# Altium PCB PCB1.PcbDoc
Units mil, origin at the board's own origin, x right, y up, seen from the top; angles counter-clockwise.
Board outline 3880 x 3235 mil, 2 copper layers (Top Layer, Bottom Layer); 25 components, 16 nets, 63 pads, 0 vias.
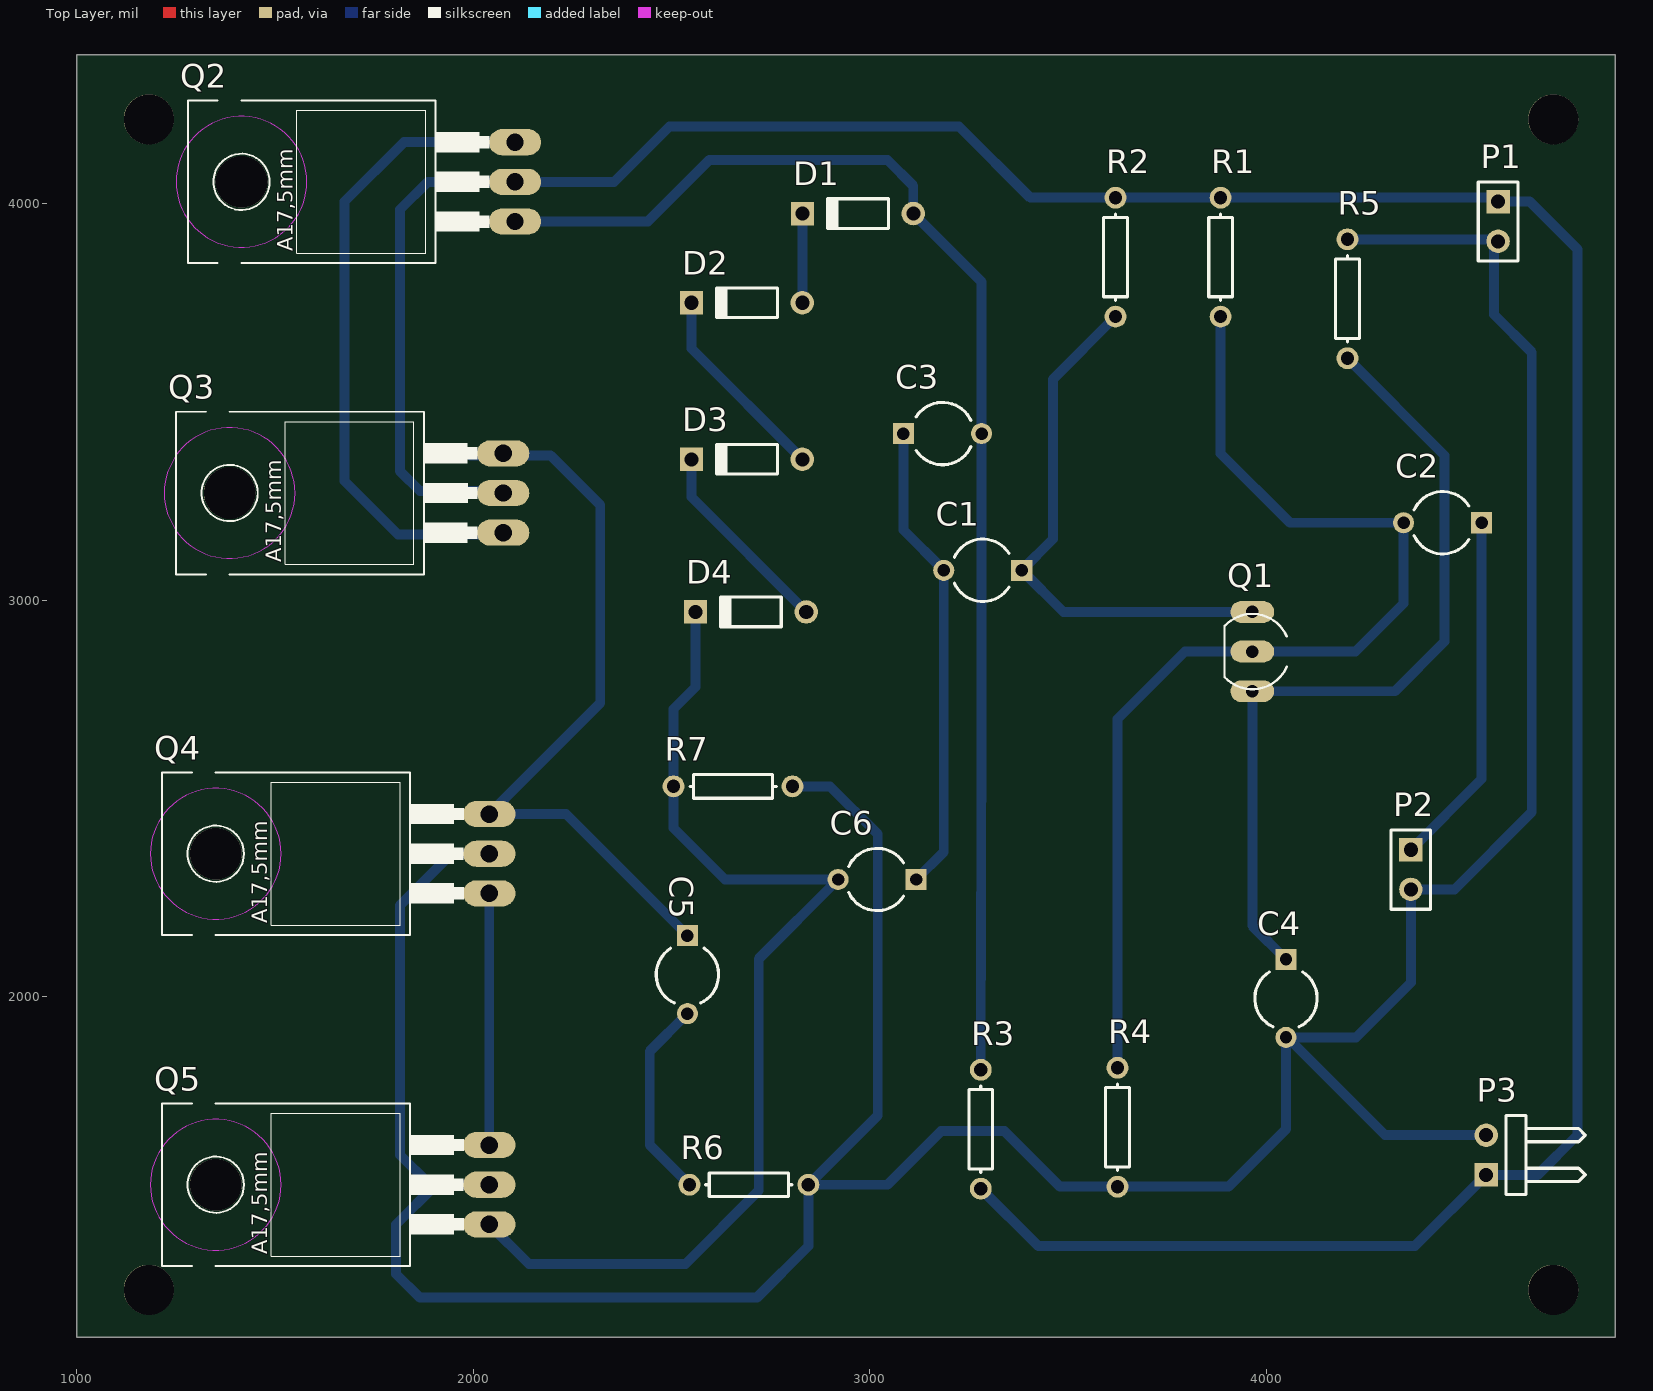
[diagram p0: Top Layer view]
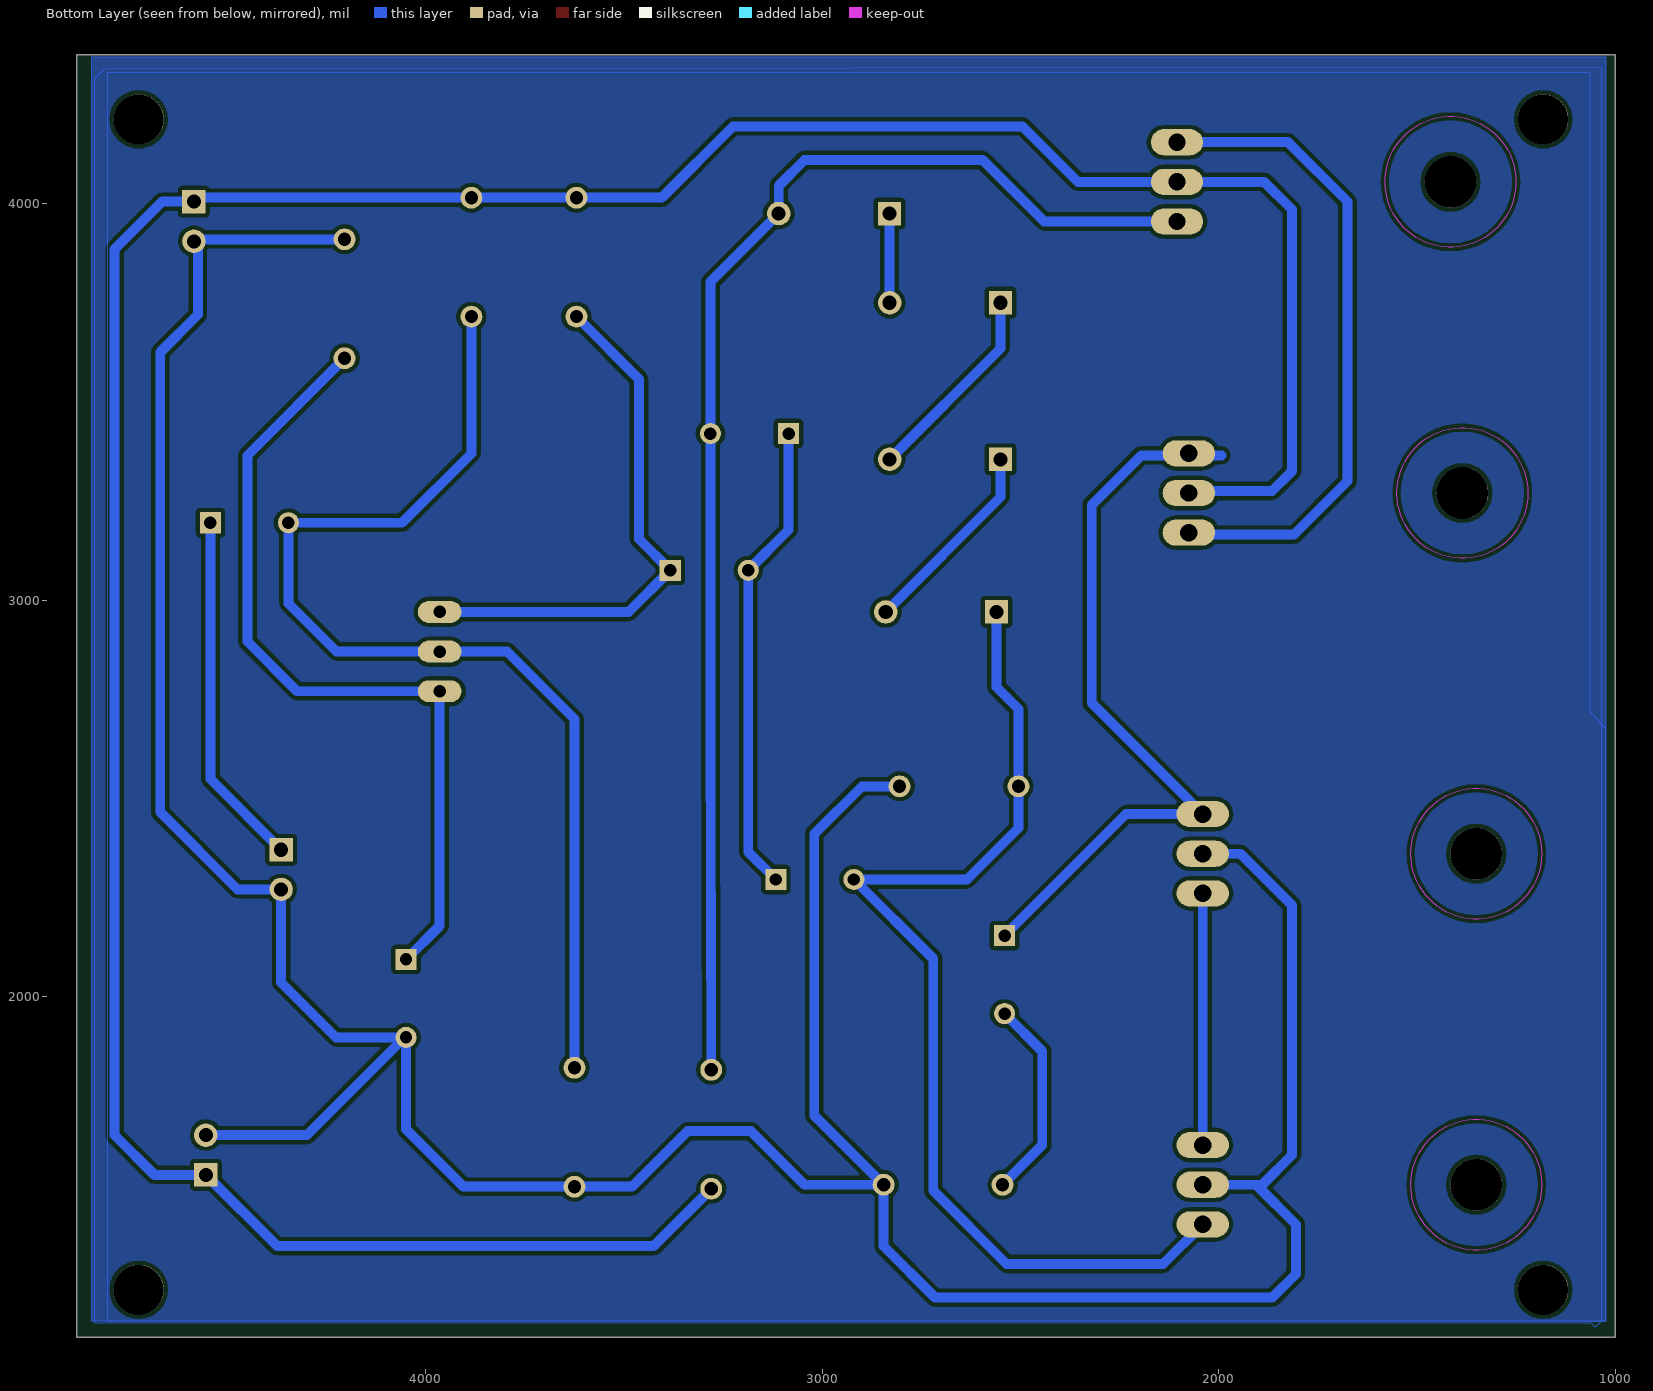
[diagram p1: Bottom Layer view, seen from below]

## Layer stack, top to bottom
Top Solder: solder mask 0.4, Solder Resist, Dk 3.5
Top Layer: signal copper 1.4
Dielectric 1: dielectric 12.6, FR-4, Dk 4.8
Bottom Layer: signal copper 1.4
Bottom Solder: solder mask 0.4, Solder Resist, Dk 3.5

## Board outline
1000,1140 4880,1140 4880,4375 1000,4375

## Design rules (kind name [scope] priority, off if disabled: settings)
Clearance [All] p1: gap=10 ignorepadtopadclearanceinfootprint=FALSE except(0: Arc-Hole Track-Hole SMDPad-Hole THPad-Hole Via-Hole Fill-Hole Poly-Hole Region-Hole Text-Hole)
PolygonConnect [All] p1: connectstyle=Relief reliefconductorwidth=10 reliefentries=4 polygonreliefangle="90 Angle" airgapwidth=10
RoomDefinition shematic [InComponentClass('shematic')] p1: confinementstyle=ConfineIn formatcopy=TRUE lockcomponents=FALSE outline 1120,1310 6865,1310 6865,4835 1120,4835
RoutingLayers [All] p1: top layer_v5=FALSE bottom layer_v5=TRUE
RoutingVias [All] p1: holewidth=28 width=50 viastyle="Through Hole" minholewidth=28 minwidth=50 maxholewidth=28 maxwidth=50
SolderMaskExpansion [All] p1: expansion=4
Width [All] p1: maxlimit=30 minlimit=25 preferedwidth=25
29 further rules are at their usual default settings.

## Components (designator, comment, footprint, x,y, rotation, side; value= is the part's Value field where it differs from the comment)
C1 "Cap2" CAPR5-4X5 3285,3075 r180 top value=1000uF
C2 "Cap2" CAPR5-4X5 4445,3195 r180 top value=1000uF
C3 "Cap2" CAPR5-4X5 3183.43,3420 r0 top value="33 uF"
C4 "Cap2" CAPR5-4X5 4050,1995 r270 top value=1000uF
C5 "Cap2" CAPR5-4X5 2540,2055 r270 top value=1000uF
C6 "Cap2" CAPR5-4X5 3018.43,2295 r180 top value="33 uF"
D1 "Diode 1N4148" DO-35 2970,3975 r180 top
D2 "Diode 1N4148" DO-35 2690,3750 r180 top
D3 "Diode 1N4148" DO-35 2690,3355 r180 top
D4 "Diode 1N4148" DO-35 2700,2970 r180 top
P1 "Fan" HDR1X2 4585,4005 r270 top
P2 "Input" HDR1X2 4365,2370 r270 top
P3 "Power" HDR1X2H 4555,1550 r90 top
Q1 "BC547" TRANSISTOR-TO92-CBE 3965,2870 r270 top
Q2 "TIP31" TO220 1855,4055 r90 top
Q3 "TIP31" TO220 1825,3270 r90 top
Q4 "TIP32" TO220 1790,2360 r90 top
Q5 "TIP32" TO220 1790,1525 r90 top
R1 "Res1" AXIAL-0.3 3885,3865 r270 top value=9K
R2 "Res1" AXIAL-0.3 3620,3865 r270 top value=100
R3 "Res1" AXIAL-0.3 3280,1665 r270 top value=10K
R4 "Res1" AXIAL-0.3 3625,1670 r90 top value=3K
R5 "Res1" AXIAL-0.3 4205,3760 r90 top value=40
R6 "Res1" AXIAL-0.3 2695,1525 r180 top value=8
R7 "Res1" AXIAL-0.3 2655,2530 r180 top value=10K

## Footprints (in the part's own frame and the unit in brackets; to place one, negate y for a bottom-side part, rotate by r counter-clockwise, add the part's x,y. Pads: shape width x height; smd on the part's side, far side on the other; paste and mask are expansions set on the pad)
AXIAL-0.3 [mm] "Axial Device, Thru-Hole; 2 Leads; 0.3 in Pin Spacing"
  round 1.4 hole 0.85: 1(-3.81,0) 2(3.81,0)
  silkscreen extent -2.77,-0.76 2.77,0.76
CAPR5-4X5 [mm] "Capacitor; 2 Leads"
  rect 1.35x1.35 hole 0.8: 1(-2.5,0)
  round 1.35 hole 0.8: 2(2.5,0)
  silkscreen extent -1.69,-2 1.82,2
DO-35 [mm] "Diode, Axial; Body 3.8 x 1.9 mm (LxDia. max), Lead Dia. 0.53 mm (max)"
  round 1.5 hole 0.9: 1(-3.55,0)
  rect 1.5x1.5 hole 0.9: 2(3.55,0)
  silkscreen extent -1.95,-0.95 2.05,0.95
HDR1X2 [mm] "Connector; Header; 2 Position"
  rect 1.5x1.5 hole 0.9: 1(0,0)
  round 1.5 hole 0.9: 2(2.54,0)
  silkscreen extent -1.27,-1.27 3.81,1.27
HDR1X2H [mm] "Connector; Header; 2 Position; Right Angle"
  rect 1.5x1.5 hole 0.9: 1(0,0)
  round 1.5 hole 0.9: 2(2.54,0)
  silkscreen extent -1.27,-6.35 3.81,-1.27
TO220 [mil]
  oval 66x132 hole 44: 1(-100,-250) 2(0,-250) 3(100,-250)
  round 130 hole 130 unplated: ""(0,440)
  Keep-Out Layer circle w0: c0,440 r165
  Keep-Out Layer circle w0: c0,440 r165
  silkscreen extent -205,-185 205,575
TRANSISTOR-TO92-CBE [mm]
  oval 1.4x2.8 hole 0.8: B(0,0) C(-2.54,0) E(2.54,0)
  silkscreen extent -2.41,-1.78 2.41,2.2

## Part data
C1 C2 C3 C4 C5 C6: "Capacitor", PackageDescription="Capacitor; 2 Leads", PackageReference=CAPR5-4X5, Published=23-Sep-2002, Publisher="Altium Limited"
D1 D2 D3 D4: "High Conductance Fast Diode", Code_JEDEC=DO-204-AH, ComponentLink1Description="Manufacturer Link", ComponentLink1URL=http://www.fairchildsemi.com/, ComponentLink2Description=Datasheet, ComponentLink2URL=http://www.fairchildsemi.com/ds/1N%2F1N4148.pdf, DatasheetVersion=1997, LatestRevisionDate=17-Jul-2002, LatestRevisionNote="Re-released for DXP Platform.", PackageDescription="Diode, Axial; Body 3.8 x 1.9 mm (LxDia. max), Lead Dia. 0.53 mm (max)", PackageReference=DO-35, Published=8-Jun-2000, Publisher="Altium Limited"
P1 P2: library part "Header 2", "Header, 2-Pin", LatestRevisionDate=17-Jul-2002, LatestRevisionNote="Re-released for DXP Platform.", Publisher="Altium Limited"
P3: library part "Header 2H", "Header, 2-Pin, Right Angle", LatestRevisionDate=17-Jul-2002, LatestRevisionNote="Re-released for DXP Platform.", Publisher="Altium Limited"
Q1: "Bipolar _BJT_ Transistor NPN 45V 100mA 300MHz 500mW Through Hole TO-92-3", Package="TO-92 ON Semiconductor", Availability=Unavailable, MF="ON Semiconductor", MP=BC547, Price=None, SnapEDA_Link=https://www.snapeda.com/parts/BC547/ON%20Semiconductor/view-part/608530/?ref=snap
Q2 Q3: "Bipolar _BJT_ Transistor NPN 40V 3A 3MHz 2W Through Hole TO-220AB", Package="TO-220 Texas Instruments", Availability=Unavailable, MF="ON Semiconductor", MP=TIP31, Price=None, SnapEDA_Link=https://www.snapeda.com/parts/TIP31/ON%20Semiconductor/view-part/2746873/?ref=snap
Q4 Q5: "Bipolar _BJT_ Transistor PNP 40V 3A 3MHz 2W Through Hole TO-220-3", Package="TO-220 ON Semiconductor", Availability=Unavailable, MF="ON Semiconductor", MP=TIP32, Price=None, SnapEDA_Link=https://www.snapeda.com/parts/TIP32/ON%20Semiconductor/view-part/4572277/?ref=snap
R1 R2 R3 R4 R5 R6 R7: "Resistor", LatestRevisionDate=17-Jul-2002, LatestRevisionNote="Re-released for DXP Platform.", PackageDescription="Axial Device, Thru-Hole; 2 Leads; 0.3 in Pin Spacing", PackageReference=AXIAL-0.3, Published=8-Jun-2000, Publisher="Altium Limited"

## Free pads (board coordinates)
  round 126 hole 126 unplated: 6(4724.41,1259.84)
  round 126 hole 126: 7(4724.41,4212.6) 8(1181.1,1259.84) 9(1181.1,4212.6)

## Nets (pads, with @x,y where several pads share a name; then routed paths per layer and width w, separated by ;. In a path a pad name is that pad's centre, name@x,y a point inside that pad or via, vN(x,y) a via of type N, cw(c..) or ccw(c..) an arc to the next point about the centre after c; other vN are vias at no path point)
"12 V DC": P1.1 P3.1 Q2.2 Q3.2 R1.1 R2.1 R3.2 | length 8044.2
  Bottom Layer w25: Q3.2 2070,3275 1865,3275 1815,3325 1815,3985 1885,4055 Q2.2 2355,4055 2495,4195 3225,4195 3405,4015 R2.1 R1.1 4575,4015 P1.1 4665,4005 4785,3885 4785,1650 4685,1550 P3.1 4375,1370 3425,1370 R3.2
GND: C4.2 P1.2 P2.2 P3.2 Q4.2 Q5.2 R4.1 R5.2 R6.1 R7.1 | length 9000.2
  Bottom Layer w25: Q5.2 1905,1525 ; Q4.2 1945,2360 1815,2230 1815,1600 1890,1525 1905,1525 ; R7.1 2900,2530 3020,2410 3020,1700 R6.1 ; R5.2 4580,3910 P1.2 4575,3895 4575,3720 4670,3625 4670,2465 4475,2270 P2.2 4365,2035 4226.57,1896.57 C4.2@4053.43,1896.57 ; P3.2 4300,1650 C4.2@4053.43,1896.57 ; 1905,1525 1805,1425 1805,1300 1865,1240 2715,1240 2845,1370 R6.1 ; R6.1 3045,1525 3180,1660 3340,1660 3480,1520 R4.1 3905,1520 4050,1665 C4.2 C4.2@4053.43,1896.57
Input: C2.1 P2.1 | length 898.9
  Bottom Layer w25: P2.1 4543.43,2548.43 C2.1
NetC1_1: C1.1 Q1.C R2.2 | length 1363.1
  Bottom Layer w25: R2.2 3462,3557 3462,3153.57 C1.1 3488.43,2970 Q1.C
NetC2_2: C2.2 Q1.B R1.2 R4.2 | length 2804.8
  Bottom Layer w25: R4.2 3625,2700 3795,2870 Q1.B 4225,2870 4346.57,2991.57 C2.2 4060,3195 3885,3370 R1.2
NetC3_2: C3.2 D1.1 Q2.1 R3.1 | length 3397.3
  Bottom Layer w25: Q2.1 2440,3955 2595,4110 3045,4110 3109.76,4045.24 D1.1 3281.85,3802.91 C3.2 3281.85,2713.85 R3.1
NetC4_1: C4.1 Q1.E R5.1 | length 2065
  Bottom Layer w25: C4.1 3965,2178.43 Q1.E 4325,2770 4450,2895 4450,3365 R5.1
NetC5_1: C5.1 Q3.3 Q4.3 | length 1901.7
  Bottom Layer w25: 1993,3365 2195,3365 2320,3240 2320,2740 Q4.3 2233.43,2460 C5.1
NetC5_2: C5.2 R6.2 | length 512.3
  Bottom Layer w25: C5.2 2445,1861.57 2445,1625 R6.2
NetC6_2: C6.2 D4.2 Q5.1 R7.2 | length 2702.6
  Bottom Layer w25: Q5.1 2140,1325 2535,1325 2720,1510 2720,2095 C6.2 2635,2295 2505,2425 R7.2 2505,2725 2560.24,2780.24 D4.2
NetD1_2: D1.2 D2.1 | length 225.2
  Bottom Layer w25: D2.1 2830.24,3750.47 D1.2
NetD2_2: D2.2 D3.1 | length 510.8
  Bottom Layer w25: D2.2 2550.24,3634.53 D3.1
NetD3_2: D3.2 D4.1 | length 504.9
  Bottom Layer w25: D3.2 2550.24,3259.53 D4.1
NetQ2_3: Q2.3 Q3.1 | length 1643.1
  Bottom Layer w25: Q3.1@2065,3165 1810,3165 1675,3300 1675,4005 1825,4155 Q2.3
NetQ4_1: Q4.1 Q5.3 | length 635
  Bottom Layer w25: Q5.3 Q4.1
"STAGE 1 OUTPUT": C1.2 C3.1 C6.1 | length 1196
  Bottom Layer w25: C3.1 3085,3176.57 C1.2 3186.57,2364.72 C6.1
pads on no net: Q2. Q3. Q4. Q5.

## Polygon pours and split planes (outlines as drawn)
no net on Bottom Layer "Bottom Layer-No Net" (solid, shelved, pour order 2): 1062.99,4330.71 4803.15,4330.71 4803.15,1181.1 1023.62,1181.1 1023.62,2677.17 1062.99,2716.54
no net on Bottom Layer "Bottom Layer-No Net" (solid, shelved, pour order 0): 1035,4345 1035,1180 1050,1165 1060,1175 4835,1175 4835,4315 4810,4340
no net on Bottom Layer "Bottom Layer-No Net" (solid, shelved, pour order 4): 1023.62,4370.08 1023.62,1181.1 4842.52,1181.1 4842.52,4370.08
no net on Bottom Layer "Bottom Layer-No Net" (solid, pour order 6): 1023.62,4370.08 1023.62,1181.1 4842.52,1181.1 4842.52,4370.08

## Text inside footprints (layer, text, board x,y; h text height)
Q2: Top Overlay "A17,5mm" at 1544.79,3879.88 h39.03 r90; Mechanical 13 "3" at 1855,4130.1 h50.06 r90; Mechanical 13 "2" at 1855,4030 h50.01 r90; Mechanical 13 "1" at 1855,3929.9 h50.04 r90
Q3: Top Overlay "A17,5mm" at 1514.79,3094.88 h39.03 r90; Mechanical 13 "3" at 1825,3345.1 h50.06 r90; Mechanical 13 "2" at 1825,3245 h50.01 r90; Mechanical 13 "1" at 1825,3144.9 h50.04 r90
Q4: Top Overlay "A17,5mm" at 1479.63,2184.79 h39.05 r90; Mechanical 13 "3" at 1790,2435.14 h50.09 r90; Mechanical 13 "2" at 1790,2334.96 h50.08 r90; Mechanical 13 "1" at 1790,2234.9 h50.04 r90
Q5: Top Overlay "A17,5mm" at 1479.63,1349.79 h39.05 r90; Mechanical 13 "3" at 1790,1600.14 h50.09 r90; Mechanical 13 "2" at 1790,1499.96 h50.08 r90; Mechanical 13 "1" at 1790,1399.9 h50.04 r90